# Altium PCB Connect_board.PcbDoc
Units mil, origin at the board's own origin, x right, y up, seen from the top; angles counter-clockwise.
Board outline 9315 x 6615 mil, 4 copper layers (Top Layer, Power, GND, Bottom Layer), stack 30.634 mil thick; 104 components, 46 nets, 313 pads, 42 vias.
Unrouted connection lines stored in the file: 17.
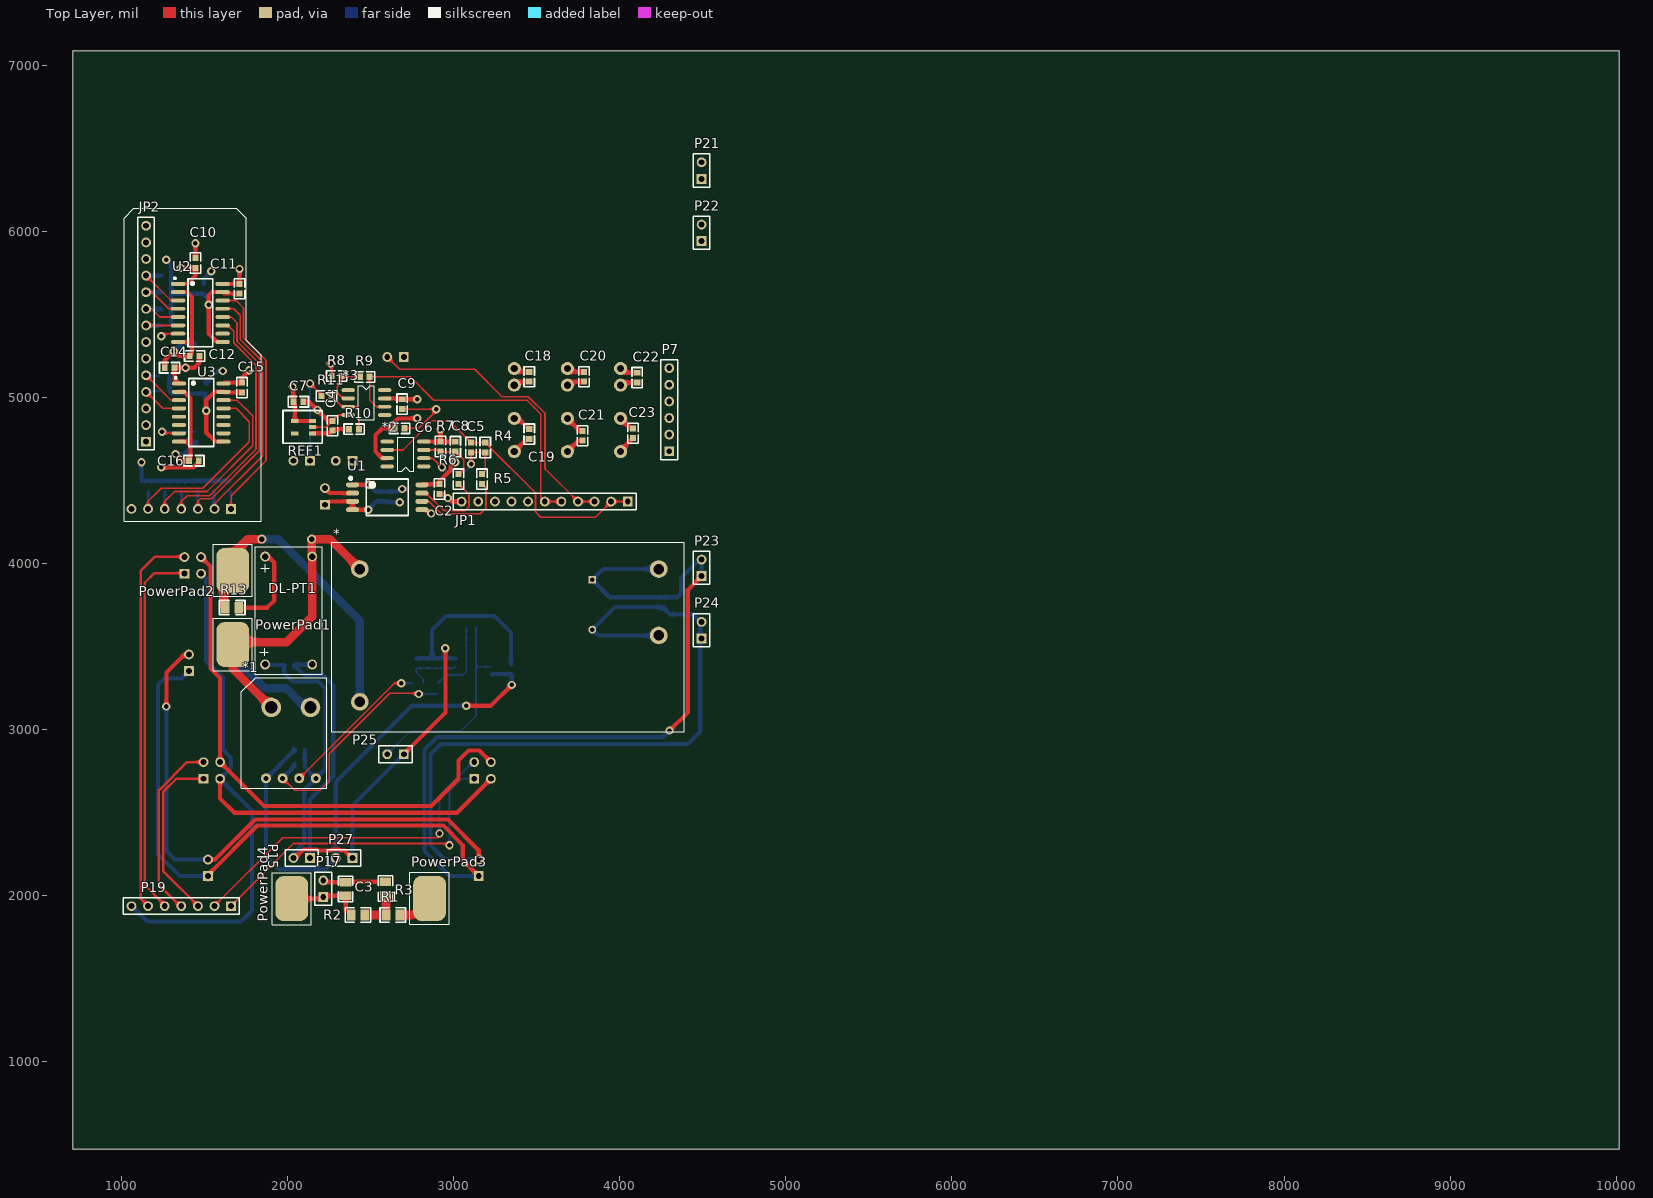
[diagram p0: Top Layer view]
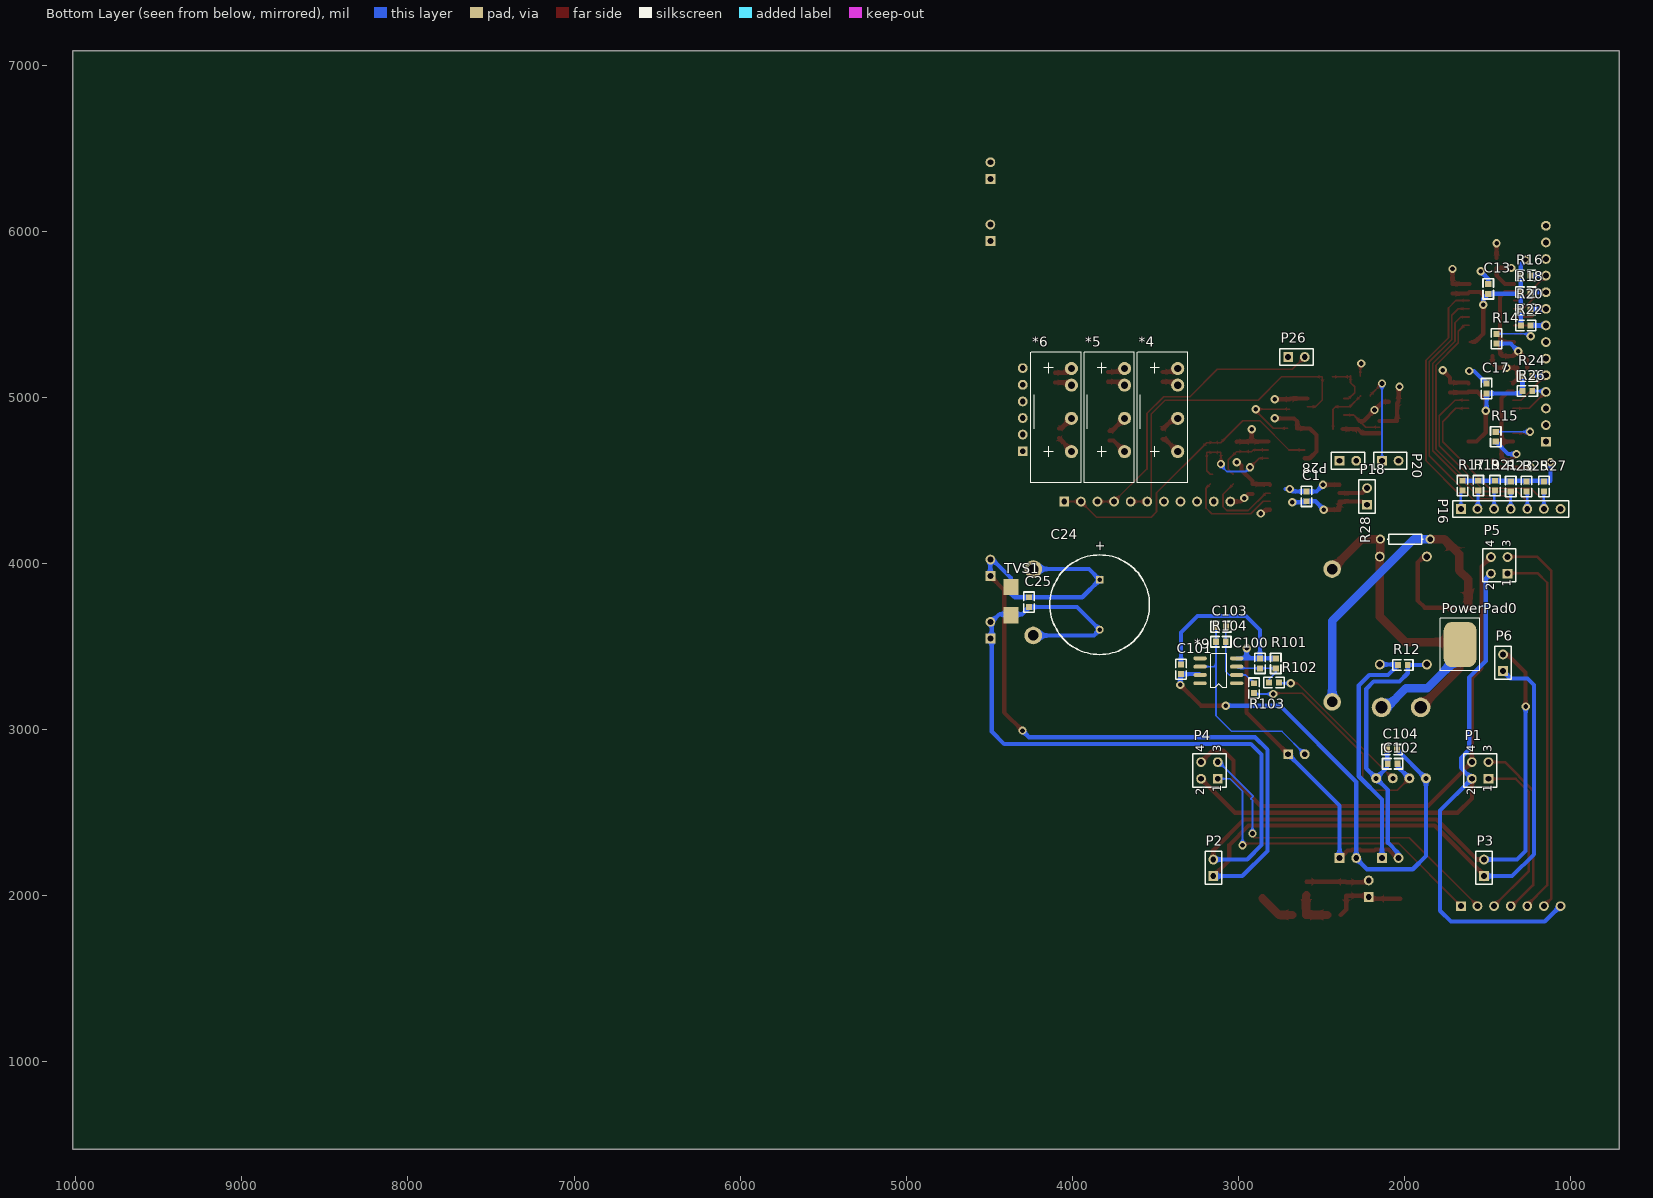
[diagram p1: Bottom Layer view, seen from below]
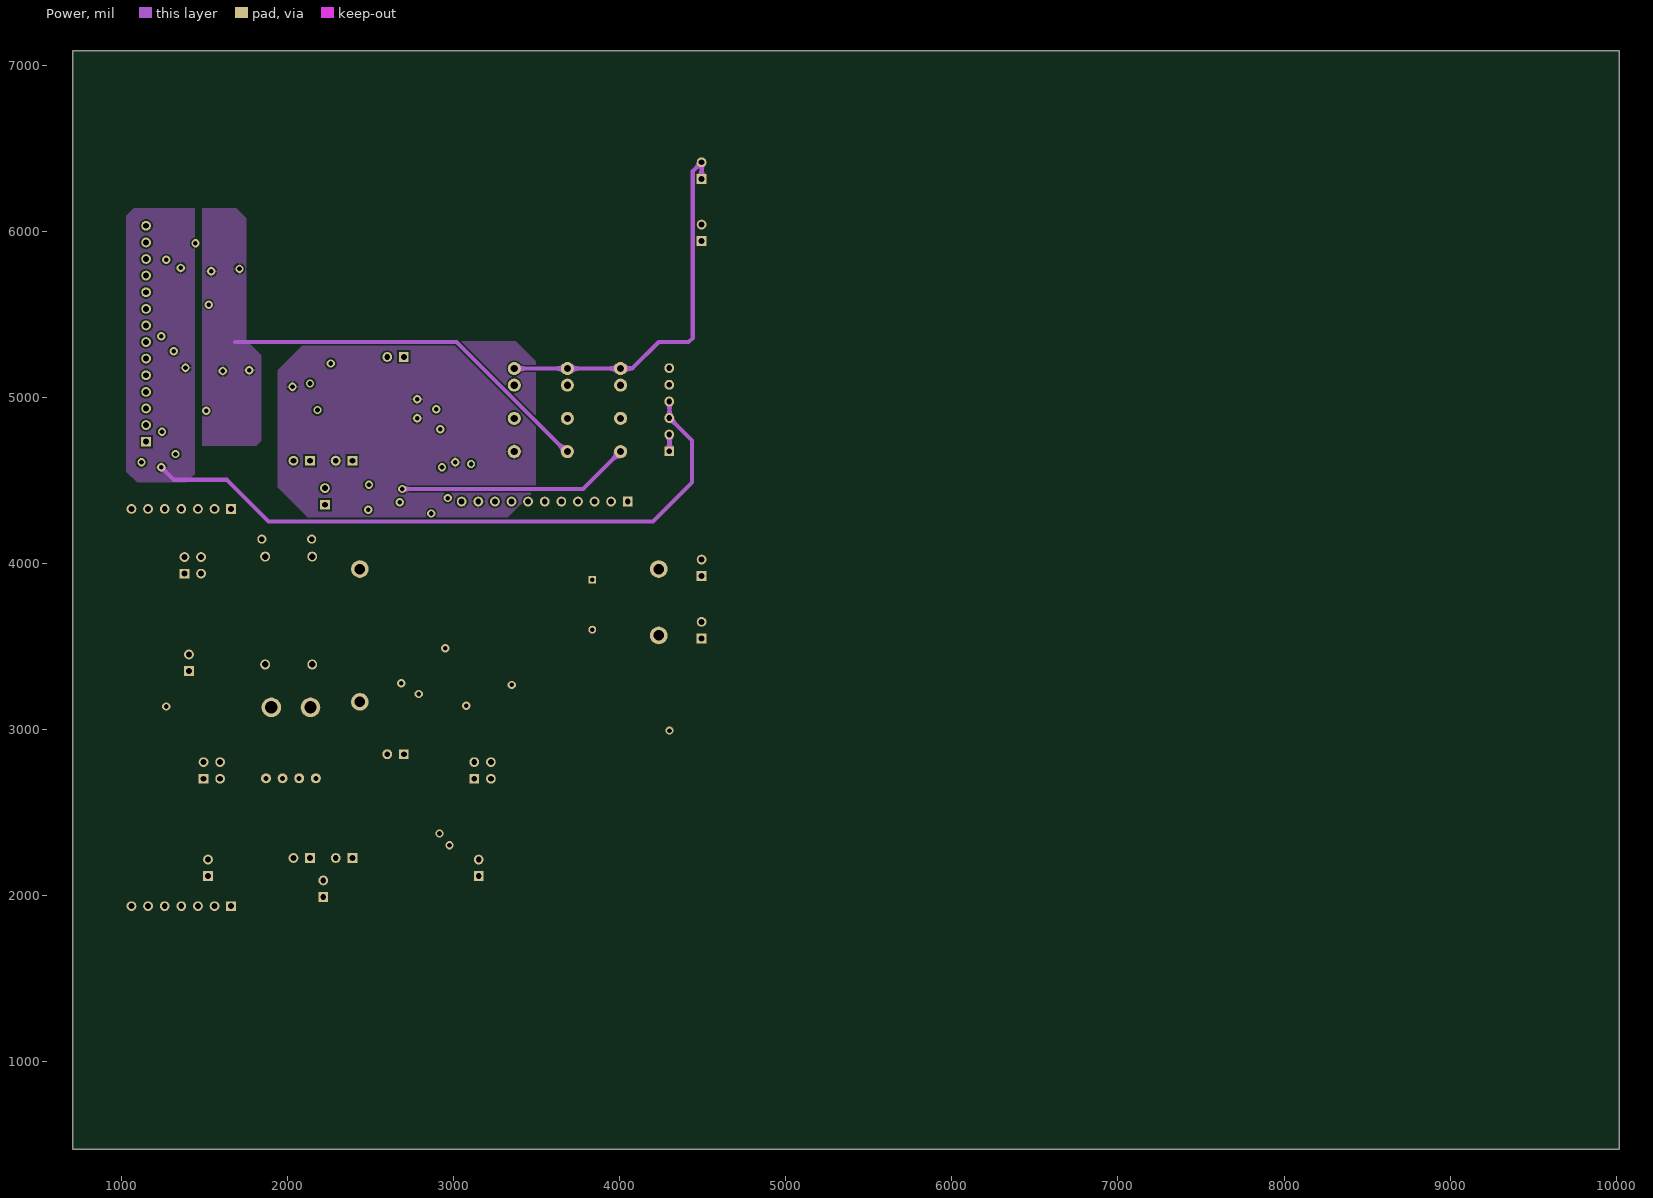
[diagram p2: Power]
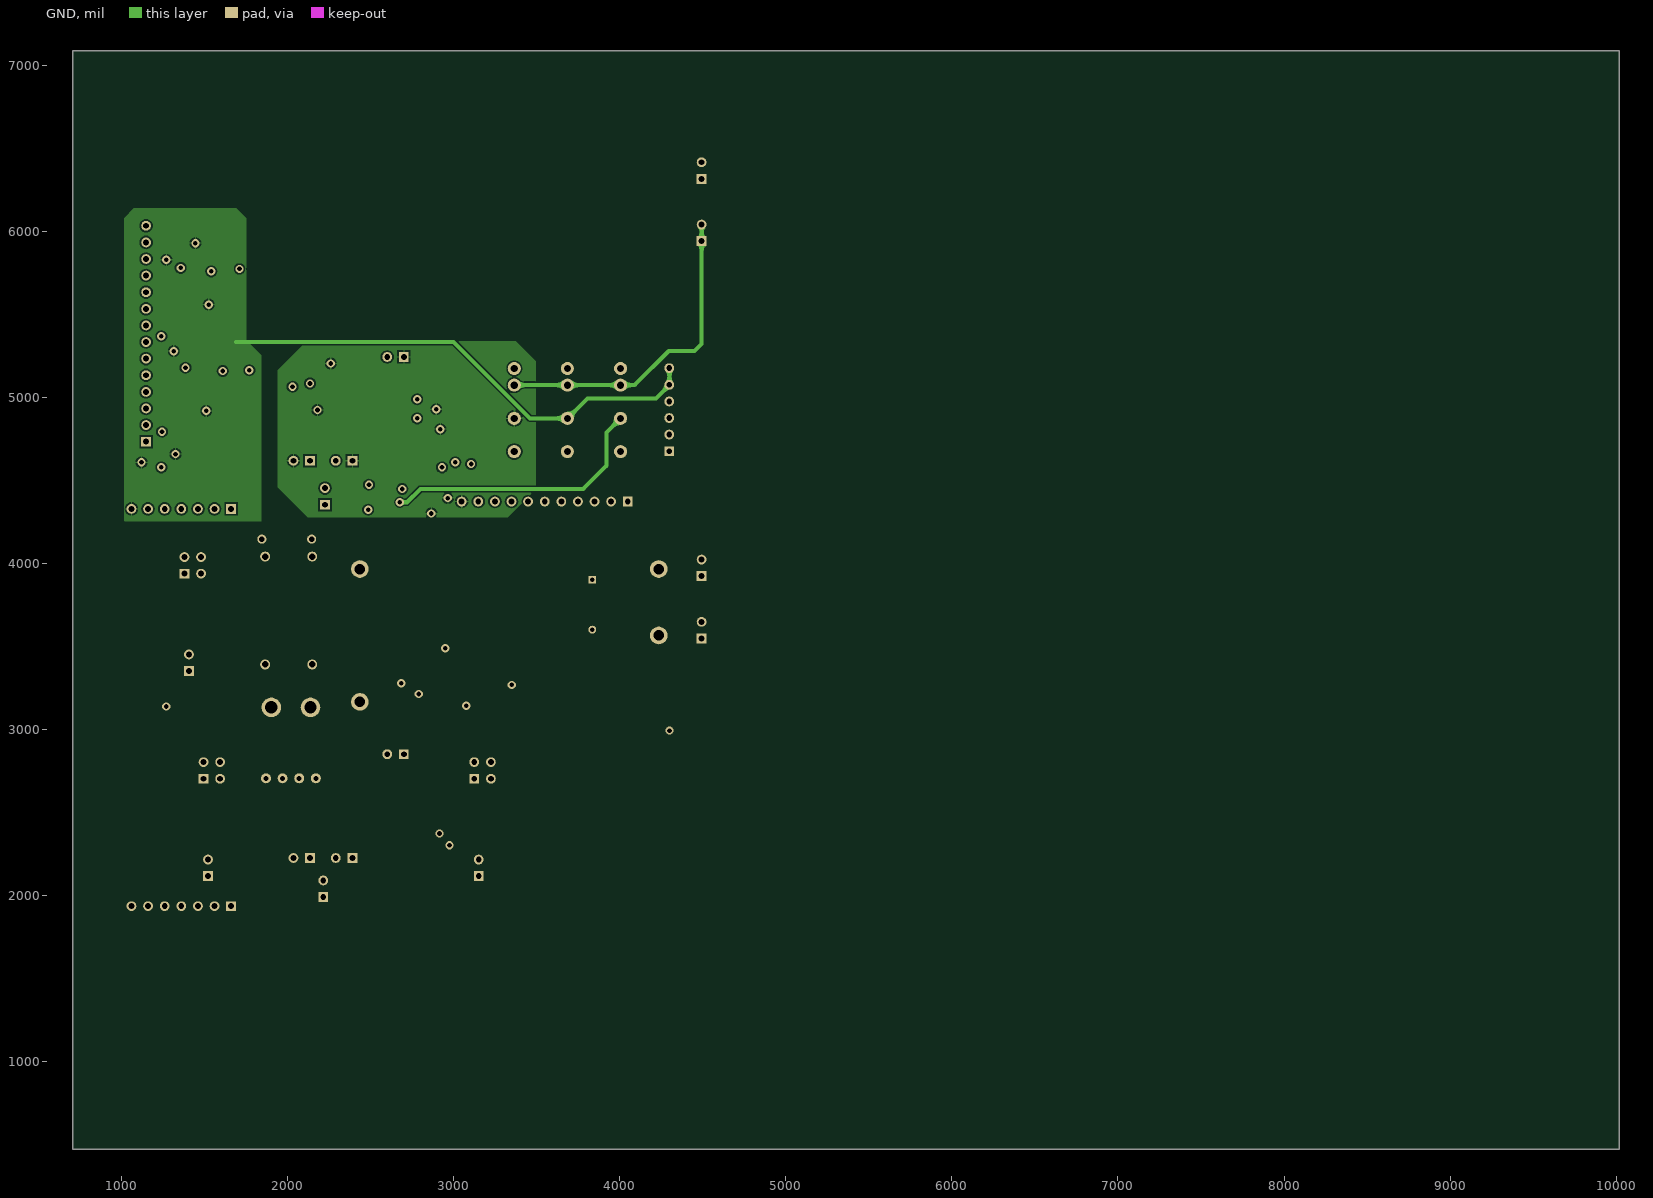
[diagram p3: GND]

## Layer stack, top to bottom
Top Solder: solder mask 0.4, Solder Resist, Dk 3.5
Top Layer: signal copper 1.4
Dielectric 1: core 10, FR-4, Dk 4.2
Power: signal copper 1.417
Dielectric 3: prepreg 5, Dk 4.2
GND: signal copper 1.417
Dielectric 2: core 10, Dk 4.2
Bottom Layer: signal copper 1.4
Bottom Solder: solder mask 0.4, Solder Resist, Dk 3.5

## Board outline
705,475 10020,475 10020,7090 705,7090

## Design rules (kind name [scope] priority, off if disabled: settings)
Clearance [All] p1: gap=10
PolygonConnect [All] p1: connectstyle=Relief reliefconductorwidth=10 reliefentries=4 polygonreliefangle="90 Angle" airgapwidth=10
RoutingVias [All] p1: holewidth=28 width=50 viastyle="Through Hole" minholewidth=28 minwidth=50 maxholewidth=28 maxwidth=50
SolderMaskExpansion [All] p1: expansion=4
Width [All] p1: maxlimit=999 minlimit=10 preferedwidth=10
30 further rules are at their usual default settings.

## Components (designator, comment, footprint, x,y, rotation, side; value= is the part's Value field where it differs from the comment)
* "LD10-13Bxx" LD10-13 2435,3967.8 r0 top
*1 "STK-20HDP1" STK-20HDP1 1870,2707.8 r90 top
*2 "opa374" OPA2374 2820,4585 r180 top
*3 "opa374" OPA2374 2365,5045 r0 top
*4 "B0905S-2W" B0905S-2W 3365,5175 r270 bottom
*5 "B0905S-2W" B0905S-2W 3685,5175 r270 bottom
*6 "B0905S-2W" B0905S-2W 4005,5175 r270 bottom
*9 "opa374" OPA2374 3010,3280 r0 bottom
C1 "100nF (104) 10% 50V" 0603_C 2590,4435 r270 bottom
C2 "100nF (104) 10% 50V" 0603_C 2915,4420 r90 top
C3 "10nF (103) 10% 50V" 1206R 2350,2000 r0 top
C4 "Cap" 0603_C 2270,4860 r270 top
C5 "100pF (104) 10% 50V" 0603_C 3105,4729.06 r270 top
C6 "100nF (101) 5% 50V" 0603_C 2645,4815 r0 top
C7 "Cap" 0603_C 2035,4975 r0 top
C8 "100pF (104) 10% 50V" 0603_C 3010,4675 r90 top
C9 "100nF (104) 10% 50V" 0603_C 2690,4990 r270 top
C10 "100nF (104) 10% 50V" 0603_C 1445,5840 r270 top
C11 "100nF (104) 10% 50V" 0603_C 1710,5685 r270 top
C12 "100nF (104) 10% 50V" 0603_C 1470,5250 r180 top
C13 "100nF (104) 10% 50V" 0603_C 1495,5625 r90 bottom
C14 "100nF (104) 10% 50V" 0603_C 1260,5180 r0 top
C15 "100nF (104) 10% 50V" 0603_C 1725,5090 r270 top
C16 "100nF (104) 10% 50V" 0603_C 1465,4620 r180 top
C17 "100nF (104) 10% 50V" 0603_C 1505,5025 r90 bottom
C18 "2.2uF" 0603_C 3455,5155 r270 top
C19 "10uF" 0603_C 3455,4810 r270 top
C20 "2.2uF" 0603_C 3785,5155 r270 top
C21 "10uF" 0603_C 3775,4800 r270 top
C22 "2.2uF" 0603_C 4105,5150 r270 top
C23 "10uF" 0603_C 4080,4815 r270 top
C24 "Cap Pol1" RB7.6-15 3835,3752.8 r90 bottom
C25 "Cap" 0603_c 4260,3797.8 r270 bottom
C100 "100pF (104) 10% 50V" 0603_C 2870,3370 r90 bottom
C101 "100nF (104) 10% 50V" 0603_C 3345,3335 r90 bottom
C102 "100nF (104) 10% 50V" 0603_C 2100,2795 r180 bottom
C103 "100pF (104) 10% 50V" 0603_C 3075,3620 r0 bottom
C104 "100nF (104) 10% 50V" 0603_C 2045,2880 r0 bottom
DL-PT1 "DL-PT202EB" DL-PT202EB 1865,4042.8 r270 top
JP1 "HDR-1X11" HDR1X11 4048.31,4374.06 r180 top locked
JP2 "HDR-1X14" HDR1X14 1148.31,4734.69 r90 top locked
P1 "Header 2X2" HDR2X2 1493.98,2704.88 r90 bottom locked
P2 "Header 2" HDR1X2 3150.75,2118.54 r90 bottom locked
P3 "Header 2" HDR1X2 1520.75,2118.54 r90 bottom locked
P4 "Header 2X2" HDR2X2 3123.98,2704.88 r90 bottom locked
P5 "Header 2X2" HDR2X2 1378.98,3939.88 r90 bottom locked
P6 "Header 2" HDR1X2 1405.75,3353.54 r90 bottom locked
P7 "Header 6" HDR1X6 4298.31,4677.2 r90 top
P15 "Header 2" HDR1X2 2135,2227.8 r180 top
P16 "Header 7" HDR1X7 1660,4330 r180 bottom
P17 "Header 2" HDR1X2 2215,1992.8 r90 top
P18 "Header 2" HDR1X2 2225,4355 r90 bottom
P19 "Header 7" HDR1X7 1660,1937.8 r180 top
P20 "Header 2" HDR1X2 2135,4620 r180 bottom
P21 "Header 2" HDR1X2 4493.31,6317.2 r90 top locked
P22 "Header 2" HDR1X2 4493.31,5942.2 r90 top locked
P23 "Header 2" HDR1X2 4493.31,3925 r90 top locked
P24 "Header 2" HDR1X2 4493.31,3550 r90 top locked
P25 "Header 2" HDR1X2 2700,2852.8 r180 top
P26 "Header 2" HDR1X2 2700,5245 r180 bottom
P27 "Header 2" HDR1X2 2390,2227.8 r180 top
P28 "Header 2" HDR1X2 2390,4620 r180 bottom
PowerPad0 "Powerpad" POWERPAD 1665,3512.8 r0 bottom
PowerPad1 "Powerpad" POWERPAD 1670,3512.8 r180 top
PowerPad2 "Powerpad" POWERPAD 1670,3960 r180 top
PowerPad3 "Powerpad" POWERPAD 2855,1985 r180 top
PowerPad4 "Powerpad" POWERPAD 2025,1982.8 r180 top
R1 "1MΩ (1004) ±1%" 1206R 2675,1885 r90 top
R2 "40KΩ (1004) ±1%" 1206R 2465,1885 r90 top
R3 "33Ω (33R0) ±1%" 1206R 2590,2085 r180 top
R4 "20KΩ (2002) ±1%" 0603_R 3190,4670 r90 top
R5 "12KΩ (1202) ±1%" 0603_R 3170,4480 r90 top
R6 "12KΩ (1202) ±1%" 0603_R 3030,4480 r90 top
R7 "20KΩ (2002) ±1%" 0603_R 2920,4735 r270 top
R8 "10kΩ±1%" 0603_R 2325,5130 r180 top
R9 "10kΩ±1%" 0603_R 2435,5125 r0 top
R10 "10kΩ±1%" 0603_R 2430,4810 r180 top
R11 "10kΩ±1%" 0603_R 2205,5010 r0 top
R12 "650Ω ±1%" 0603_R 1980,3390 r0 bottom
R13 "200kΩ±1%" 1206R 1625,3735 r270 top
R14 "510Ω (5100) ±1%" 0603_R 1445,5325 r90 bottom
R15 "510Ω (5100) ±1%" 0603_R 1450,4735 r90 bottom
R16 "10KΩ (1002) ±1%" 0603_R 1240,5735 r0 bottom
R17 "10KΩ (1002) ±1%" 0603_R 1650,4440 r90 bottom
R18 "10KΩ (1002) ±1%" 0603_R 1240,5635 r0 bottom
R19 "10KΩ (1002) ±1%" 0603_R 1555,4440 r90 bottom
R20 "10KΩ (1002) ±1%" 0603_R 1240,5530 r0 bottom
R21 "10KΩ (1002) ±1%" 0603_R 1455,4440 r90 bottom
R22 "10KΩ (1002) ±1%" 0603_R 1240,5435 r0 bottom
R23 "10KΩ (1002) ±1%" 0603_R 1360,4435 r90 bottom
R24 "10KΩ (1002) ±1%" 0603_R 1230,5130 r0 bottom
R25 "10KΩ (1002) ±1%" 0603_R 1265,4435 r90 bottom
R26 "10KΩ (1002) ±1%" 0603_R 1230,5040 r0 bottom
R27 "10KΩ (1002) ±1%" 0603_R 1160,4435 r90 bottom
R28 "MOV 14D561K" AXIAL-0.3 1995,4147.8 r0 bottom
R101 "10kΩ±1%" 0603_R 2775,3370 r90 bottom
R102 "1kΩ±1%" 0603_R 2815,3285 r180 bottom
R103 "1kΩ±1%" 0603_R 2905,3280 r270 bottom
R104 "5kΩ±1%" 0603_R 3135,3530 r180 bottom
REF1 "REF2030" SOT23-5 2150,4785 r90 top
TVS1 "TVS" SMB 4370,3690 r90 bottom
U1 "ACPLC87B" LC-SOP-8_268mil 2600,4400 r270 top
U2 "ADuM140" LC-SOIC-16_208mil 1475,5510 r270 top
U3 "ADuM140" LC-SOIC-16_208mil 1480,4910 r270 top

## Footprints (in the part's own frame and the unit in brackets; to place one, negate y for a bottom-side part, rotate by r counter-clockwise, add the part's x,y. Pads: shape width x height; smd on the part's side, far side on the other; paste and mask are expansions set on the pad)
0603_C [mm]
  rect 0.9x0.95 smd: 1(0,0) 2(1.5,0)
  silkscreen extent -0.8,-0.8 2.3,0.8
0603_c [mm]
  rect 0.9x0.95 smd: 1(0,0) 2(1.5,0)
  silkscreen extent -0.8,-0.8 2.3,0.8
0603_R [mm]
  rect 0.9x0.95 smd: 1(0,0) 2(1.5,0)
  silkscreen extent -0.8,-0.8 2.3,0.8
1206R [mm]
  rect 1.7x1.28 smd: 1(0,0) 2(0,2.08)
  silkscreen extent -1.1,-0.9 1.1,3
AXIAL-0.3 [mm] "Axial Device, Thru-Hole; 2 Leads; 0.3 in Pin Spacing"
  round 1.4 hole 0.85: 1(-3.81,0) 2(3.81,0)
  silkscreen extent -2.77,-0.76 2.77,0.76
B0905S-2W [mm]
  round 2 hole 1.1: 1(0,0) 2(2.54,0) 4(7.62,0) 6(12.7,0)
  silkscreen extent -2.5,-6.2 17.5,1.5
DL-PT202EB [mil]
  round 60 hole 39.37: 1(0,0) 2(0,283.46) 3(649.61,283.46) 4(649.61,0)
  silkscreen extent -59,-59 709,343
HDR1X2 [mm] "Connector; Header; 2 Position"
  rect 1.5x1.5 hole 0.9: 1(0,0)
  round 1.5 hole 0.9: 2(2.54,0)
  silkscreen extent -1.27,-1.27 3.81,1.27
HDR1X6 [mm] "Connector; Header; 6 Position"
  rect 1.5x1.5 hole 0.9: 1(0,0)
  round 1.5 hole 0.9: 2(2.54,0) 3(5.08,0) 4(7.62,0) 5(10.16,0) 6(12.7,0)
  silkscreen extent -1.27,-1.27 13.97,1.27
HDR1X7 [mm] "Connector; Header; 7 Position"
  rect 1.5x1.5 hole 0.9: 1(0,0)
  round 1.5 hole 0.9: 2(2.54,0) 3(5.08,0) 4(7.62,0) 5(10.16,0) 6(12.7,0) 7(15.24,0)
  silkscreen extent -1.27,-1.27 16.51,1.27
HDR1X11 [mm] "Connector; Header; 11 Position"
  rect 1.5x1.5 hole 0.9: 1(0,0)
  round 1.5 hole 0.9: 2(2.54,0) 3(5.08,0) 4(7.62,0) 5(10.16,0) 6(12.7,0) 7(15.24,0) 8(17.78,0) 9(20.32,0) 10(22.86,0) 11(25.4,0)
  silkscreen extent -1.27,-1.27 26.67,1.27
HDR1X14 [mm] "Connector; Header; 14 Position"
  rect 1.5x1.5 hole 0.9: 1(0,0)
  round 1.5 hole 0.9: 2(2.54,0) 3(5.08,0) 4(7.62,0) 5(10.16,0) 6(12.7,0) 7(15.24,0) 8(17.78,0) 9(20.32,0) 10(22.86,0) 11(25.4,0) 12(27.94,0) 13(30.48,0) 14(33.02,0)
  silkscreen extent -1.27,-1.27 34.29,1.27
HDR2X2 [mm] "Connector; Header; 2x2 Position"
  rect 1.5x1.5 hole 0.9: 1(0,0)
  round 1.5 hole 0.9: 2(0,2.54) 3(2.54,0) 4(2.54,2.54)
  silkscreen extent -1.27,-1.27 3.81,3.81
LC-SOIC-16_208mil [mm]
  oval 0.6x2.2 smd: 1(-4.445,-3.4) 2(-3.175,-3.4) 3(-1.905,-3.4) 4(-0.635,-3.4) 5(0.635,-3.4) 6(1.905,-3.4) 7(3.175,-3.4) 8(4.445,-3.4) 9(4.445,3.4) 10(3.175,3.4) 11(1.905,3.4) 12(0.635,3.4) 13(-0.635,3.4) 14(-1.905,3.4) 15(-3.175,3.4) 16(-4.445,3.4)
  silkscreen extent -5.45,-4.05 5.2,1.9
LC-SOP-8_268mil [mm]
  oval 0.76x2 smd: 1(-1.905,-5.3) 2(-0.635,-5.3) 3(0.635,-5.3) 4(1.905,-5.3) 5(1.905,5.3) 6(0.635,5.3) 7(-0.635,5.3) 8(-1.905,5.3)
  silkscreen extent -3.1,-5.8 2.8,3.2
LD10-13 [mm]
  round 2.7 hole 1.6: 1(0,0) 2(0,-20.32) 3(45.72,0) 4(45.72,-10.16)
  silkscreen extent -4.3,-24.9 49.6,4.1
OPA2374 [mil]
  oval 80x24 smd: 1(0,0) 2(0,-50) 3(0,-100) 4(0,-150) 5(220,-150) 6(220,-100) 7(220,-50) 8(220,0)
  silkscreen extent 59,-177 157,28
POWERPAD [mm]
  rrect50% 5x6.9 smd: 1(0,0)
  silkscreen extent -3,-4 3,4
RB7.6-15 [mm] "Polarized Capacitor (Radial); 2 Leads"
  rect 1.2x1.2 hole 0.7: 1(3.81,0)
  round 1.2 hole 0.7: 2(-3.81,0)
  silkscreen extent -7.62,-7.62 7.62,7.62
SMB [mm]
  rect 2.5x2.3 smd: 1(0,0) 3(4.3,0)
SOT23-5 [mm]
  rect 0.6x1.1 smd: 1(0,0) 2(0.95,0) 3(1.9,0) 4(1.9,2.7) 5(0,2.7)
  silkscreen extent -1.5,-1.5 3.5,4.5
STK-20HDP1 [mil]
  round 60 hole 30: 1(0,0) 2(0,-100) 3(0,-200) 4(0,-300)
  round 118.11 hole 74.8: 5(427.17,-31.89) 6(427.17,-268.11)
  silkscreen extent -59,-366 606,150

## Part data
*2 *3 *9: library part opa2374
C1 C2 C5 C8 C9 C10 C11 C12 C13 C14 C15 C16 C17 C18 C19 C20 C21 C22 C23 C100 C101 C102 C103 C104: library part "0603 100nF (104) 10% 50V", "贴片电容"
C3: library part "0603 10nF (103) 10% 50V", "贴片电容"
C4 C7 C25: "Capacitor"
C6: library part "0603 100pF (101) 5% 50V", "贴片电容"
C24: "Polarized Capacitor (Radial)"
JP1: library part "Header 11", "11P接插件"
JP2: library part "Header 14", "14P接插件"
P1 P4 P5: "Header, 2-Pin, Dual row"
P2 P3 P6 P15 P17 P18 P20 P21 P22 P23 P24 P25 P26 P27 P28: "Header, 2-Pin"
P7: "Header, 6-Pin"
P16 P19: "Header, 7-Pin"
R1 R2 R8 R9 R10 R11 R12 R13 R101 R102 R103 R104: library part "0603 1MΩ (1004) 1%", "贴片电阻"
R3: library part "0603 33Ω (33R0) 1%", "贴片电阻"
R4 R7: library part "0603 20KΩ (2002) 1%", "贴片电阻"
R5 R6: library part "0603 12KΩ (1202) 1%", "贴片电阻"
R14 R15: library part "0603 510Ω (5100) 1%", "贴片电阻"
R16 R17 R18 R19 R20 R21 R22 R23 R24 R25 R26 R27: library part "0603 10KΩ (1002) 1%", "贴片电阻"
R28: library part Res1, "Resistor"

## Via types
v1: diameter 50, hole 28, Top Layer to Bottom Layer, 42 vias

## Nets (pads, with @x,y where several pads share a name; then routed paths per layer and width w, separated by ;. In a path a pad name is that pad's centre, name@x,y a point inside that pad or via, vN(x,y) a via of type N, cw(c..) or ccw(c..) an arc to the next point about the centre after c; other vN are vias at no path point)
3.0V: REF1.5
9V: *4.1 *5.1 *6.1 *.3 C18.1 C20.1 C22.1 C24.1 C25.1 P2.1 P3.1 P6.1 P21.1 P21.2 P23.1 P23.2 TVS1.3 | length 11097.2
  Top Layer w25: P3.1@1520,2100 1520,2125 1817.5,2422.5 2938.54,2422.5 3054.29,2306.75 3054.29,2215 P2.1 ; *4.1 3385,5155 C18.1 ; *5.1 3705,5155 C20.1 ; *6.1 4030,5150 C22.1 ; v1(4300,2995) 4410,3105 4410,3841.69 P23.1
  Power w25: *4.1 *5.1 *6.1 4075,5175 4235,5335 4415,5335 4440,5360 4440,6363.9 P21.2 P21.1
  Bottom Layer w25: P6.1 1361.4,3309.19 1259.19,3309.19 1220,3270 1220,2250 1351.46,2118.54 P3.1 ; P2.1 2976.46,2118.54 2825,2270 2825,2880 2900,2955 4260,2955 v1(4300,2995) ; *.3 3900,3967.8 C24.1 3940,3797.8 C25.1 4345.71,3797.8 4370,3822.09 4370,3915 P23.2@4480,4025 ; P23.1 P23.2
A5V: *1.1 *2.7 *3.7 *4.6 *9.7 C2.2 C6.1 C7.1 C9.1 C19.2 C101.1 C104.1 JP1.10 P27.2 P28.2 REF1.3 REF1.4 U1.8 | length 4578
  Top Layer w25: v1(2030,5065) 2035,5060 C7.1 2043.7,4966.3 REF1.4 REF1.3 ; *3.7 2685,4995 C9.1 v1(2780,4990) ; *2.7 2570,4635 2530,4675 2530,4775 2570,4815 C6.1 2645,4855 2665,4875 v1(2780,4875) ; U1.8 2812.72,4479.06 C2.2 2915,4497.82 2980,4562.82 2980,4591.57 2998.43,4610 v1(3010,4610) ; v1(3075,3145) 3225,3145 v1(3350,3270) ; *4.6 3440.94,4750.94 C19.2
  Bottom Layer w25: C104.1 1872.8,2707.8 *1.1 1870,2240 1950,2160 2225,2160 2285,2220 P27.2@2285,2230 ; P27.2 2290,2685 2750,3145 3010,3145 ; 2995,3145 3010,3145 ; v1(3075,3145) 3010,3145 ; *9.7 3235,3335 C101.1 3350,3330 v1(3350,3270)
AC+: *1.5 *1.6 *.1 DL-PT1.2 PowerPad0.1 PowerPad1.1 R28.2 | length 2512.3
  Top Layer w50: *1.5 1670,3366.85 PowerPad1.1 1685,3527.8 1995,3527.8 2148.46,3681.26 DL-PT1.2 2145,4046.26 R28.2 2255,4147.8 *.1
  Bottom Layer w50: PowerPad0.1@1690,3512.8 1690,3422.2 1862.2,3250 1989.92,3250 2104.96,3134.96 *1.6
AC-: *.2 PowerPad2.1 R13.1 R28.1 | length 1843.3
  Top Layer w50: R13.1 1615,3745 1615,3905 PowerPad2.1 1670,4057.8 1760,4147.8 R28.1
  Bottom Layer w50: R28.1 1942.2,4147.8 2435,3655 *.2
AGND: *1.4 *2.4 *3.4 *4.4 *9.4 C2.1 C4.1 C6.2 C7.2 C8.2 C9.2 C19.1 C100.2 C101.2 C102.1 C104.2 DL-PT1.4 JP1.11 P15.2 P20.2 P25.1 P26.1 P27.1 P28.1 R7.1 R8.2 R12.1 R101.2 REF1.2 U1.5 | length 6466.7
  Top Layer w10: REF1.2 2232.4,4822.4 C4.1 2305,4895 *3.4 ; v1(2260,5205) 2265.94,5199.06 R8.2 ; C9.2 2894.06,4930.94 v1(2895,4930) 2895,4920 2790,4815 C6.2
  Top Layer w25: P15.2 2044.12,2227.8 2096.15,2279.82 2173.85,2279.82 2181.17,2272.5 2261.13,2272.5 2268.45,2279.82 2311.55,2279.82 2318.87,2272.5 2342.5,2272.5 P27.1@2385,2230 ; C7.2 2130,4975 v1(2180,4925) 2245,4860 C4.1 ; P25.1 2950,3102.8 v1(2950,3490) ; U1.5 2835,4325 2857.5,4302.5 v1(2865.93,4302.5) ; *2.4 R7.1 ; C2.1 2940,4420 v1(2965,4395) 2985.94,4374.06 JP1.11 ; v1(2920,4810) R7.1 ; C8.2 3009.06,4735 R7.1 ; *4.4 3390,4875 C19.1
  GND w10: v1(2260,5205) v1@2260,5220
  Bottom Layer w25: DL-PT1.4 1868.19,3390 R12.1 1980,3340 2030,3290 2185,3290 2230,3245 2230,2767.8 *1.4 ; P15.2 2035,2255 2100,2320 2100,2637.8 *1.4 ; C104.2 2104.06,2773.74 *1.4 ; P27.1 2390,2542.8 P25.1 ; R101.2 2775.94,3430 C100.2@2870,3430 ; C100.2 C100.2@2870,3430 ; v1(2950,3490) 2950,3430 ; *9.4 2950,3430 ; C101.2 3345,3585 3245,3685 2955,3685 2870,3600 C100.2@2870,3430 ; C100.2@2870,3430 2950,3430
D5V: *5.6 C11.1 C13.2 C15.1 C17.2 C21.2 P1.4 P4.4 P5.4 U2.16 U3.16 | length 6386.6
  Top Layer w10: U2.16 C11.1
  Top Layer w25: P5.4 1535,3983.86 1535,3370 1593.98,3311.02 P1.4 1858.86,2540 2865,2540 3030,2705 3030,2815 3090,2875 3153.86,2875 P4.4 P4.4@3235.12,2804.88 ; U2.16 C11.1 v1(1710,5775) ; U3.16 1618.86,5090 C15.1 1725,5120 v1(1770,5165) ; *5.6 3750.94,4740.94 C21.2
  Power w25: 1685,5335 3017.5,5335 3677.5,4675 *5.6
  Bottom Layer w25: C13.2 1495,5715 v1(1540,5760) ; C17.2 1580.94,5160 v1(1610,5160)
DC48+: PowerPad3.1 R1.1 | length 221.4
  Top Layer w50: R1.1 2755,1885 PowerPad3.1
DC48-: *6.4 C1.2 C3.1 C23.1 P17.1 P18.1 PowerPad4.1 R2.2 U1.3 U1.4 | length 2754.7
  Top Layer w25: PowerPad4.1 2207.8,1982.8 2215,1990 P17.1 2222.2,2000 C3.1 2350,1918.11 R2.2 ; P18.1 2230,4350 2255,4375 U1.3 U1.4 v1(2485,4325) ; *6.4 4065,4815 C23.1
  GND w25: v1(2675,4370) 2720,4370 2800,4450 3780,4450 3920,4590 3920,4790 *6.4
  Bottom Layer w25: v1(2485,4325) 2535.94,4375.94 C1.2 2595.94,4370 v1(2675,4370)
DC48_5V: *6.6 C1.1 C23.2 U1.1 | length 1866.7
  Top Layer w25: U1.1 v1(2490,4475) ; *6.6 4005,4680.94 C23.2
  Power w25: v1(2690,4450) 3780,4450 *6.6
  Bottom Layer w25: v1(2490,4475) 2530,4435 C1.1 2675,4435 v1(2690,4450) 2715,4450
DC400-: *4.2 *5.2 *6.2 *.4 C18.2 C20.2 C22.2 C24.2 C25.2 P2.2 P3.2 P6.2 P22.1 P22.2 P24.1 P24.2 TVS1.1 | length 10026.6
  Top Layer w25: v1(1270,3140) 1270,3345 1378.54,3453.54 P6.2 ; P3.2 1564.05,2218.54 1805.5,2460 2965,2460 3150.75,2274.25 P2.2 ; *4.2 3385.94,5095.94 C18.2 ; *5.2 3705.94,5095.94 C20.2 ; *6.2 4020.94,5090.94 C22.2
  GND w25: *4.2 *5.2 *6.2 4090,5075 4295,5280 4450,5280 4493.31,5323.31 P22.1 P22.2
  Bottom Layer w25: v1(1270,3140) 1270,2270 1321.46,2218.54 P3.2 ; P2.2 2946.46,2218.54 2860,2305 2860,2850 2925,2915 4410,2915 4485,2990 4485,3650 4440,3695 4303.74,3695 C25.2 3970.94,3738.74 C24.2 3870,3567.8 *.4
DC_VOLTAGE: C3.2 P17.2 P18.2 R3.1 U1.2 | length 559.6
  Top Layer w25: P17.2 2225.91,2081.89 C3.2 2353.11,2085 R3.1 ; P18.2 2255,4425 U1.2
DGND: *5.4 C10.1 C11.2 C12.2 C13.1 C14.1 C15.2 C16.2 C17.1 C21.1 P1.2 P4.2 P5.2 P7.5 P7.6 P16.7 P19.7 R14.1 R15.1 R16.2 R17.2 R18.2 R19.2 R20.2 R21.2 R22.2 R23.2 R24.2 R25.2 R26.2 R27.2 U2.2 U2.8 U2.9 U2.15 U3.2 U3.8 U3.9 U3.15 | length 12896.1
  Top Layer w10: U2.9@1585,5335 U2.9
  Top Layer w25: C14.1 1260,5225 v1(1315,5280) 1345,5250 C12.2 1425,5264.05 1425,5335 ; v1(1325,4660) 1365,4620 C16.2 1415,4629.06 1415,4735 ; U2.8 1425,5335 ; U2.2 1395,5635 1425,5605 1425,5335 ; U3.8 1415,4735 ; U3.2 1378.11,5035 1415,4998.11 1415,4735 ; C10.1 v1(1445,5930) ; U2.9@1585,5335 1575,5335 1525,5385 v1(1525,5560) 1525,5615 1545,5635 U2.15 1617.91,5625.94 C11.2 ; P1.2 1593.98,2586.02 1680,2500 3019.09,2500 P4.2 ; U3.9 1565,4735 1510,4790 v1(1510,4920) 1510,4985 1560,5035 U3.15 ; U3.15@1617.91,5030.94 C15.2 ; *5.4 3760,4800 C21.1
  GND w25: 1690,5335 3000,5335 3460,4875 *5.4 3805,4995 4217.8,4995 4300,5077.2 P7.6@4300,5177.2
  Bottom Layer w25: P19.7@1060,1940 1155,1845 1720,1845 1785,1910 1785,2513.86 P1.2 1660,2770.91 1660,2830 1610,2880 1610,3315 1510,3415 1510,3908.86 P5.2 ; v1(1120,4610) 1120,4499.06 ; v1(1270,5830) 1299.06,5800.94 R16.2 R18.2 ; R24.2 R26.2 1304.06,5025 C17.1 1505,4925 v1(1510,4920) ; R22.2 R20.2 R18.2 ; v1(1315,5280) 1360,5325 R14.1 ; v1(1325,4660) 1375,4660 R15.1 ; 1410,4499.06 1120,4499.06 ; v1(1525,5560) 1525,5595 C13.1 1309.06,5625 R18.2 ; R17.2 1120,4499.06
DLP_3: DL-PT1.3 P15.1 P20.1 R11.1 R12.2 | length 2063.6
  Top Layer w10: v1(2135,5085) 2205,5015 R11.1
  Bottom Layer w10: P20.1 v1(2135,5085)
  Bottom Layer w25: P15.1 2135,2580 2275,2720 2275,3266.65 2211.65,3330 2099.06,3330 R12.2 2042.24,3393.19 DL-PT1.3
DSP_D3.3V: C10.2 C12.1 C14.2 C16.1 P7.3 P7.4 U2.1 U3.1 | length 4794.3
  Top Layer w25: v1(1240,4580) 1241.2,4578.8 1432.98,4578.8 1465,4610.82 C16.1 C16.1@1470,4625 ; U2.1 1395,5685 1445,5735 C10.2 v1(1355.94,5780.94) ; U3.1 1319.06,5112.09 C14.2 v1(1385,5180) 1440,5180 1470,5210 C12.1
  Power w25: v1(1240,4580) 1315,4505 1635,4505 1885,4255 4200,4255 4435,4490 4435,4742.2 4300,4877.2 P7.4@4300,4977.2
I_AC: *1.3 JP1.3 JP1.4 P26.2 R102.2 | length 2730.3
  Top Layer w10: *1.3 2071.38,2707.8 2643.58,3280 v1(2685,3280) ; P26.2 2675,5170 3126.26,5170 3291.26,5005 3450,5005 3550,4905 3550,4570 3552.36,4570 JP1.4 JP1.3
  Bottom Layer w10: v1(2685,3280) 2750.94,3280 R102.2
I_AC_C: *9.6 C103.2 P25.2 R104.1 | length 1265.3
  Bottom Layer w10: P25.2 2737.2,2990 3040,2990 3135,3085 3135,3390 ; R104.1@3134.06,3530 C103.2 ; R104.1 3135,3390 ; *9.6 3145,3380 3135,3390
Net*2_2: *2.2 C5.2 R4.1 R5.2 | length 650.9
  Top Layer w10: *2.2 2875,4635 v1(2930,4580) ; v1(3105,4600) C5.2 R4.1 3190,4559.06 R5.2 R5.2@3155.94,4539.06
  Bottom Layer w10: v1(2930,4580) 2955,4555 3070,4555 3105,4590 v1(3105,4600)
Net*2_3: *2.3 C8.1 R6.2 R7.2 | length 363.2
  Top Layer w10: *2.3 2910.94,4685 R7.2 2920.94,4675 C8.1 3060,4625 3060,4569.06 R6.2
Net*3_2: *3.2 R8.1 R9.1 | length 301.9
  Top Layer w10: *3.2 2335,4995 2300,5030 2300,5065 2325,5090 R8.1 2330,5125 R9.1
Net*3_3: *3.3 R10.1 R11.2 | length 319.1
  Top Layer w10: R11.2 2329.06,4945 *3.3 2415,4945 2430,4930 R10.1
Net*9_2: *9.2 C103.1 R103.1 R104.2 | length 469.8
  Bottom Layer w10: R103.1 2955,3330 *9.2 3055,3330 3075.94,3350.94 R104.2 3075.94,3619.06 C103.1
Net*9_3: *9.3 C100.1 R101.1 R102.1 | length 340.7
  Bottom Layer w10: R102.1 2815,3305 2775,3345 R101.1 C100.1 3000,3370 *9.3
NetDL-PT1_1: DL-PT1.1 R13.2 | length 538.6
  Top Layer w25: R13.2 1877.2,3735 1920,3777.8 1920,4007.8 DL-PT1.1@1865,4062.8
NetP7_1: P7.1 P7.2 | length 100
  Power w25: P7.1@4300,4677.2 P7.2@4300,4777.2
NetR1_2: R1.2 R2.1 R3.2 | length 247.5
  Top Layer w50: R2.1 R1.2 2593.11,2000 R3.2
NetR14_2: R14.2 U2.7 | length 318.2
  Top Layer w10: v1(1240,5370) 1255,5385 U2.7
  Bottom Layer w10: v1(1240,5370) 1254.06,5384.06 R14.2
NetR15_2: R15.2 U3.7 | length 311.8
  Top Layer w10: v1(1244.06,4794.06) 1253.11,4785 U3.7
  Bottom Layer w10: v1(1244.06,4794.06) R15.2
PWM_H_L1: P5.1 P16.5 P19.5 R25.1 U3.14 | length 3453.5
  Top Layer w10: P16.5 1260,4375 1320,4435 1515,4435 1790,4710 1790,4890 1695,4985 U3.14
  Top Layer w15: P19.5@1262.5,1942.5 1140,2065 1140,3885 1197.8,3942.8 P5.1@1360,3942.8
  Bottom Layer w15: P16.5 1260,4430 R25.1
PWM_H_L2: P5.3 P16.6 P19.6 R27.1 U3.13 | length 3533.4
  Top Layer w10: P16.6 1160,4375 1240,4455 1490,4455 1770,4735 1770,4855 1690,4935 U3.13
  Top Layer w15: P19.6@1160,1940 1115,1985 1115,3955 1202.8,4042.8 P5.3@1360,4042.8
  Bottom Layer w15: P16.6 R27.1
PWM_L_L1: P4.1 P16.1 P19.1 R17.1 U2.14 | length 3591.2
  Top Layer w10: U2.14 1690,5585 1735,5540 1735,5360 1870,5225 1870,4620 1660,4410 P16.1 ; P19.1@1660,1940 2035,2315 2965,2315 v1(2975,2305)
  Bottom Layer w10: v1(2975,2305) 2975,2629.88 3050,2704.88 P4.1
  Bottom Layer w15: R17.1 1660,4430 P16.1
PWM_L_L2: P4.3 P16.2 P19.2 R19.1 U2.13 | length 3766.1
  Top Layer w10: P19.2@1560,1940 1970,2350 2905,2350 2915,2360 v1(2915,2375) ; P16.2 1560,4360 1850,4650 1850,5215 1715,5350 1715,5495 1675,5535 U2.13
  Bottom Layer w10: R19.1 1560,4435 P16.2 ; v1(2915,2375) 2915,2575 2925,2585 2910,2600 3114.88,2804.88 P4.3
  Bottom Layer w15: R19.1 1555,4335 P16.2
PWM_L_R1: P1.1 P16.3 P19.3 R21.1 U2.12 | length 2629
  Top Layer w10: P16.3 1460,4375 1475,4390 1540,4390 1830,4680 1830,5205 1695,5340 1695,5450 1660,5485 U2.12
  Top Layer w15: P19.3@1460,1940 1250,2150 1250,2625 1329.88,2704.88 P1.1
  Bottom Layer w15: R21.1 1460,4435 P16.3
PWM_L_R2: P1.3 P16.4 P19.4 R23.1 U2.11 | length 2656.3
  Top Layer w10: P16.4 1360,4375 1395,4410 1530,4410 1810,4690 1810,5195 1675,5330 1675,5400 1640,5435 U2.11
  Top Layer w15: P19.4@1345,1945 1225,2065 1225,2635.36 1394.53,2804.88 P1.3
  Bottom Layer w15: P16.4 R23.1
PWMIN_HL1: JP2.5 R24.1 U3.3 | length 343.5
  Top Layer w10: JP2.5 1297.99,4985 U3.3
  Bottom Layer w10: JP2.5 1152.99,5130 R24.1
PWMIN_HL2: JP2.4 R26.1 U3.4 | length 323
  Top Layer w10: JP2.4 1247.99,4935 U3.4
  Bottom Layer w10: JP2.4 1153.62,5040 R26.1
PWMIN_LL1: JP2.11 R16.1 U2.3 | length 346.7
  Top Layer w10: JP2.11 1297.99,5585 U2.3
  Bottom Layer w25: JP2.11 1239.68,5734.69 R16.1
PWMIN_LL2: JP2.10 R18.1 U2.4 | length 325.9
  Top Layer w10: JP2.10 1185.32,5634.69 1285,5535 U2.4
  Bottom Layer w25: JP2.10 1239.68,5634.69 R18.1
PWMIN_LR1: JP2.9 R20.1 U2.5 | length 307
  Top Layer w10: JP2.9 1180.32,5534.69 1230,5485 U2.5
  Bottom Layer w25: JP2.9 1235.32,5534.69 R20.1
PWMIN_LR2: JP2.8 R22.1 U2.6 | length 284.8
  Top Layer w10: JP2.8 1340.83,5434.69 U2.6
  Bottom Layer w25: JP2.8 1239.68,5434.69 R22.1
V_AC: *3.6 JP1.5 JP1.6 R9.2 | length 2007.7
  Top Layer w10: *3.6 2535,4945 2494.06,4985.94 R9.2 2740,5125 2880,4985 3441.72,4985 3525,4901.72 3525,4397.36 JP1.6 JP1.5
V_DC: *2.6 C5.1 JP1.1 JP1.2 R4.2 | length 1866.8
  Top Layer w10: *2.6 2695,4685 2870,4860 2974.06,4860 C5.1 R4.2 3492.83,4426.22 3492.83,4312.17 3525,4280 3854.25,4280 JP1.2 JP1.1
VOUT+: R6.1 U1.7 | length 500.3
  Top Layer w10: U1.7 2835,4425 2940,4320 3070,4320 3092.83,4342.83 3092.83,4417.17 R6.1
VOUT-: R5.1 U1.6 | length 587.3
  Top Layer w10: U1.6 2850,4375 2925,4300 3160,4300 3195,4335 3195,4455 R5.1
VREF: *1.2 C102.2 R103.2 | length 1425.2
  Top Layer w10: *1.2 2042.8,2635 2195,2635 2250,2690 2250,2855 2615,3220 2785,3220 v1(2790,3215)
  Bottom Layer w10: v1(2790,3215) 2899.06,3215 R103.2
  Bottom Layer w25: *1.2 2040.94,2778.74 C102.2
VREF_1.5V: C4.2 R10.2 REF1.1 | length 231.3
  Top Layer w25: REF1.1 2254.06,4785 C4.2 2279.06,4810 R10.2
pads on no net: *2.1 *2.5 *2.8 *3.1 *3.5 *3.8 *9.1 *9.5 *9.8 JP1.7 JP1.8 JP1.9 JP2.1 JP2.2 JP2.3 JP2.6 JP2.7 JP2.12 JP2.13 JP2.14 U2.10 U3.5 U3.6 U3.10 U3.11 U3.12

## Polygon pours and split planes (outlines as drawn)
A5V on Power "Top Layer-No Net" (solid, pour order 14): 2080,5305 1940,5165 1940,4460 2120,4280 3315,4280 3325,4280 3465,4420 3495,4450 3495,5220 3375,5340 2115,5340 2075,5300
D5V on Power "Top Layer-No Net" (solid, pour order 10): 1485,6140 1690,6140 1750,6080 1750,5345 1840,5255 1840,4990 1840,4740 1810,4710 1580,4710 1485,4710
DSP_D3.3V on Power "Top Layer-No Net" (solid, pour order 7): 1030,4555 1095,4490 1390,4490 1430,4530 1440,4540 1440,5260 1440,6140 1075,6140 1030,6095 1030,5015 1030,4555
AGND on GND "Top Layer-No Net" (solid, pour order 17): 2115,5340 1940,5165 1940,4460 2120,4280 3325,4280 3495,4450 3495,5220 3375,5340 2115,5340
DGND on GND "Top Layer-No Net" (solid, pour order 12): 1075,6140 1015,6080 1015,4255 1840,4255 1840,5255 1750,5345 1750,6080 1690,6140

## Silkscreen, mask and mechanical layers (free items; w line width, h text height)
Top Overlay:
  lines w3.94: 1015,4255 1015,6080 1075,6140 1690,6140 1750,6080 1750,5345 1840,5255 1840,4255 1015,4255
Mechanical 1:
  lines w3.94: 705,475 705,7090 10020,7090 10020,475 705,475 ; 1005,1822.8 1005,4185 4548.31,4185 4548.31,2847.8 3285,2847.8 3285,1822.8 3230,1822.8 1005,1822.8 ; 1005,4215 1005,6577.2 1755,6577.2 1755,5362.2 4400,5362.2 4400,6577.2 4548.31,6577.2 4548.31,4215 1005,4215

## Text inside footprints (layer, text, board x,y; h text height)
C24: Bottom Overlay "+" at 3805.99,4072.95 h59.06 r270
P1: Bottom Overlay "1" at 1473.98,2624.88 h50 r270; Bottom Overlay "2" at 1573.98,2604.88 h50 r270; Bottom Overlay "4" at 1573.98,2864.88 h50 r270; Bottom Overlay "3" at 1473.98,2864.88 h50 r270
P4: Bottom Overlay "1" at 3103.98,2624.88 h50 r270; Bottom Overlay "2" at 3203.98,2604.88 h50 r270; Bottom Overlay "4" at 3203.98,2864.88 h50 r270; Bottom Overlay "3" at 3103.98,2864.88 h50 r270
P5: Bottom Overlay "1" at 1358.98,3859.88 h50 r270; Bottom Overlay "2" at 1458.98,3839.88 h50 r270; Bottom Overlay "4" at 1458.98,4099.88 h50 r270; Bottom Overlay "3" at 1358.98,4099.88 h50 r270